# Altium PCB FMCOMMS3.PcbDoc (part 3 of 3)
Units mil, origin at the board's own origin, x right, y up, seen from the top; angles counter-clockwise.
Board outline 3368 x 2770 mil, 4 copper layers (Top Layer, Layer 1, Layer 2, Bottom Layer), stack 23.756 mil thick; 160 components, 137 nets, 746 pads, 735 vias.
Unrouted connection lines stored in the file: 16.
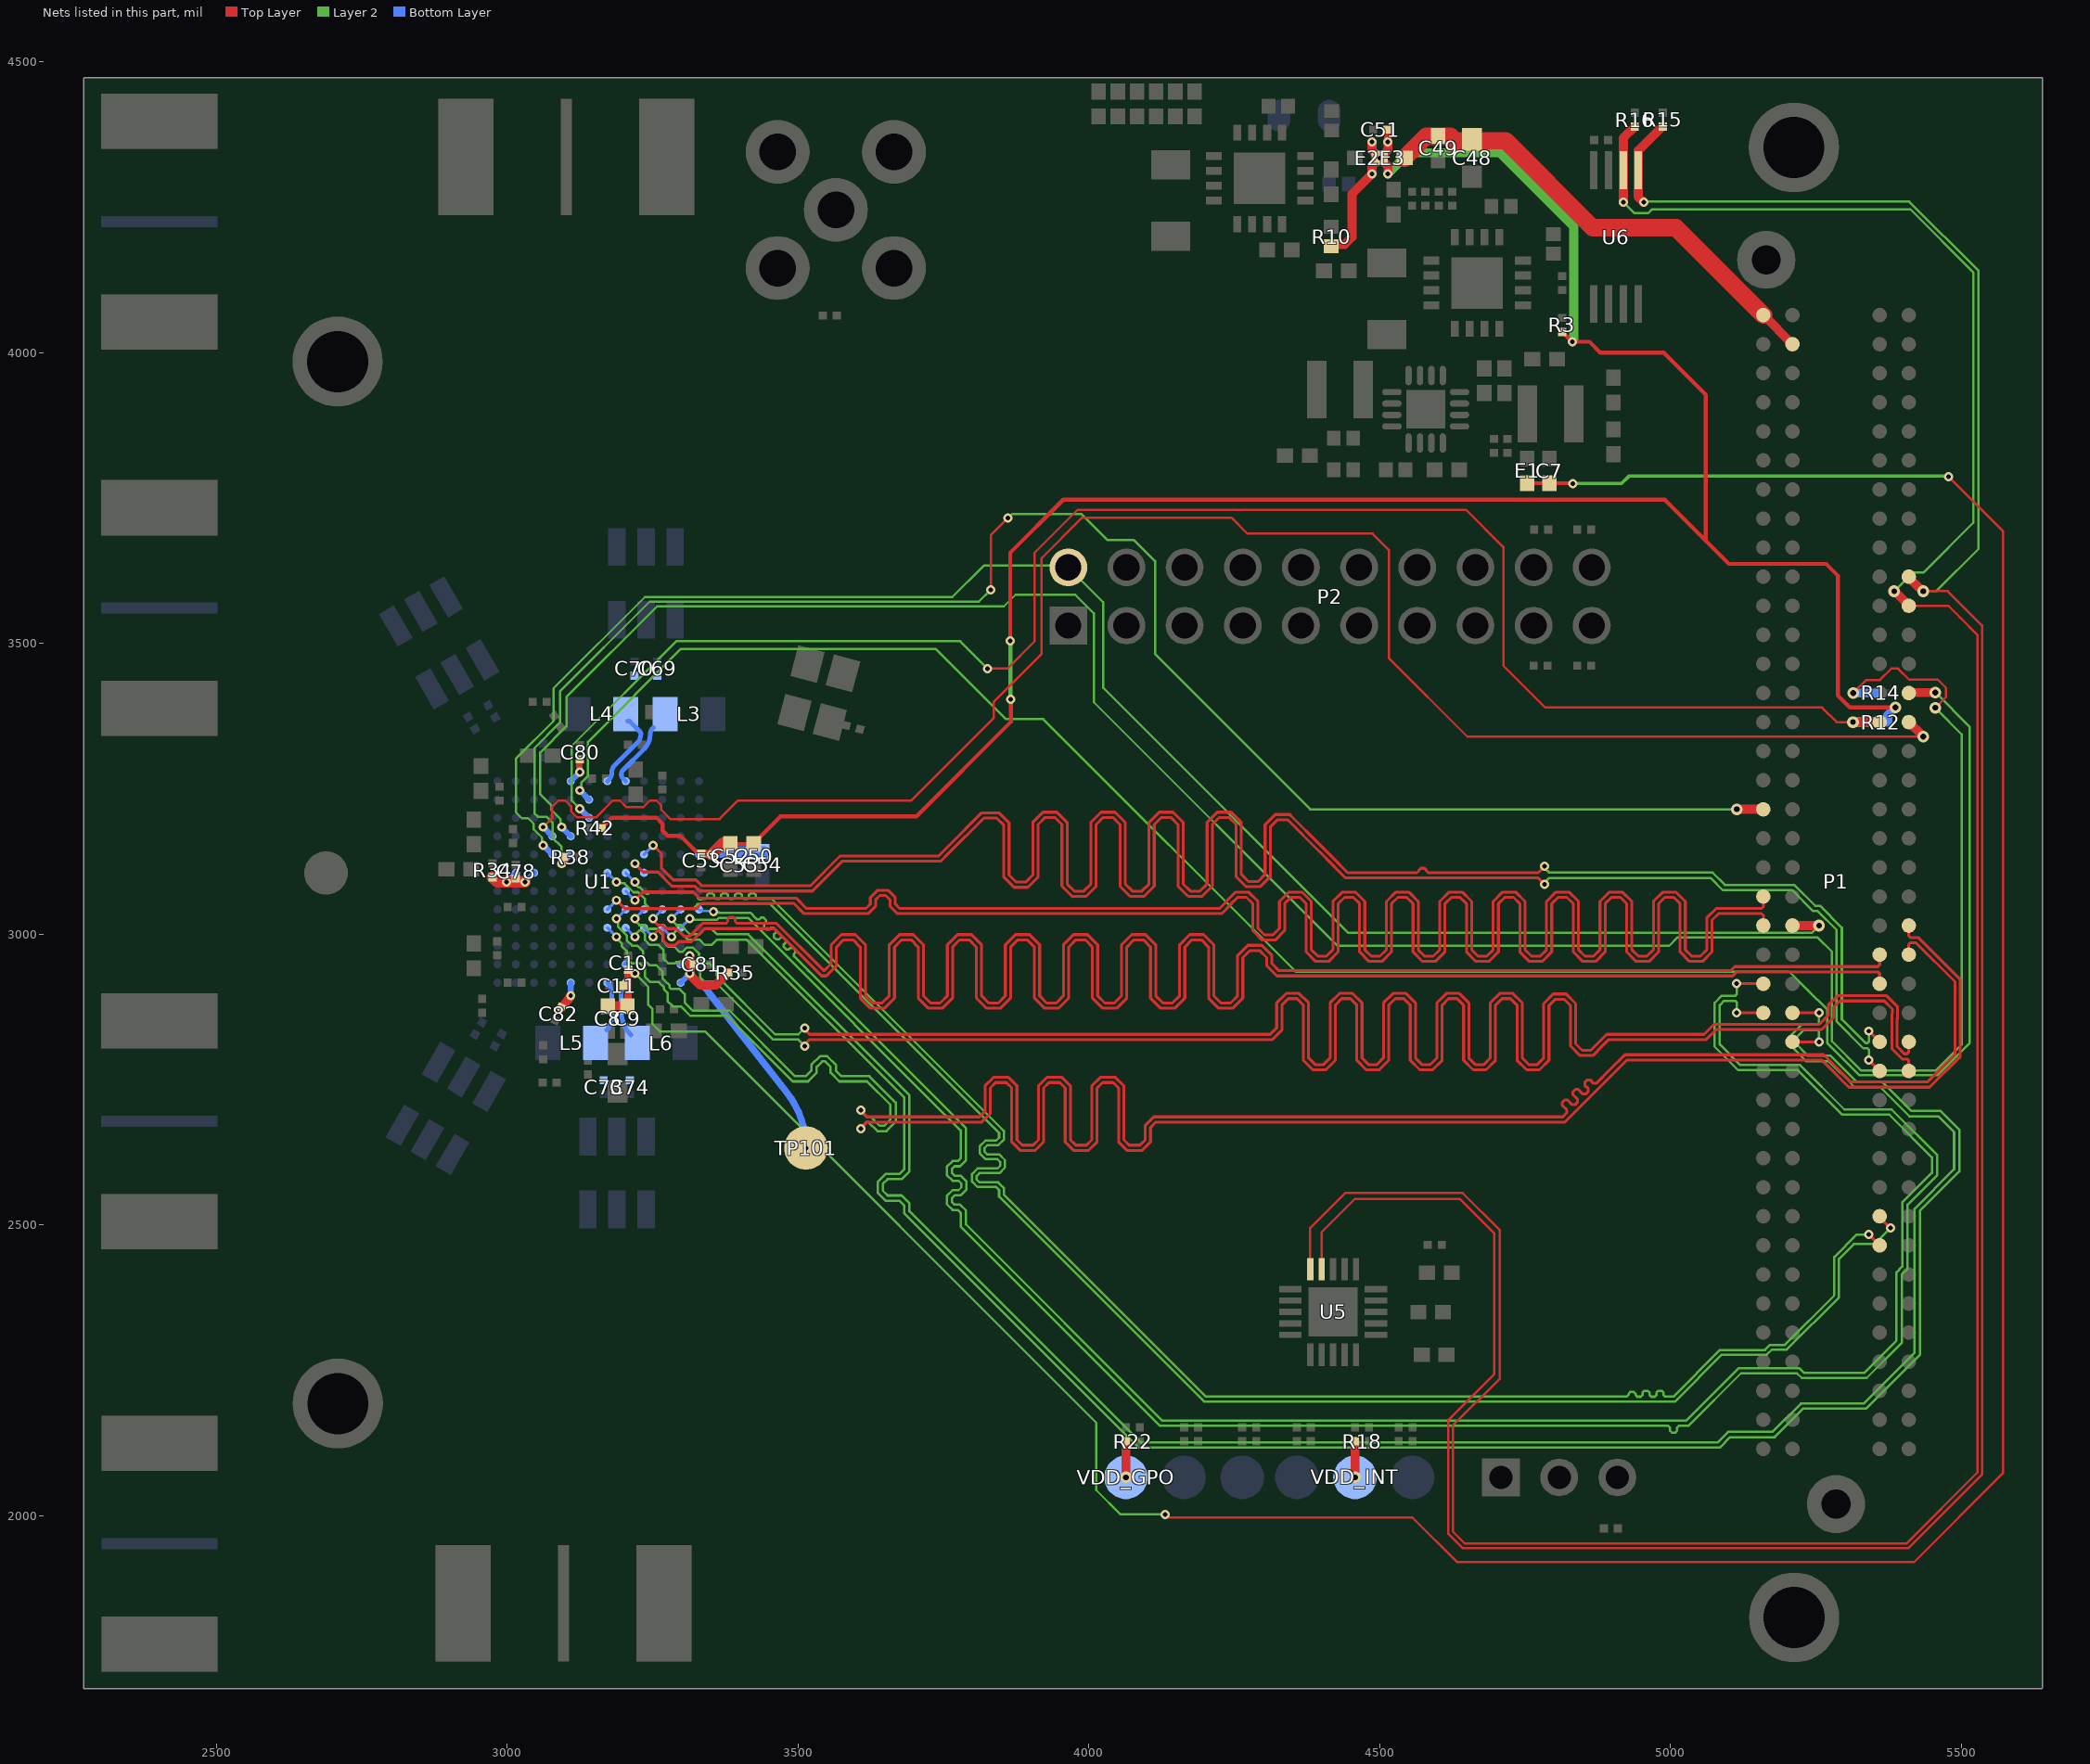
[diagram p5: the nets of this part, all layers, seen from the top]

## Via types
v1: diameter 20, hole 10, Top Layer to Bottom Layer, tented both sides, 410 vias
v2: diameter 15.75, hole 7.87, Top Layer to Bottom Layer, tented both sides, 157 vias
v3: diameter 16, hole 8, Top Layer to Bottom Layer, tented both sides, 154 vias
v4: diameter 28, hole 12, Top Layer to Bottom Layer, 14 vias

## Nets (pads, with @x,y where several pads share a name; then routed paths per layer and width w, separated by ;. In a path a pad name is that pad's centre, name@x,y a point inside that pad or via, vN(x,y) a via of type N, cw(c..) or ccw(c..) an arc to the next point about the centre after c; other vN are vias at no path point) (continued)
RX_FRAME_N: P1.D9 U1.G7 | length 2975.6
  Top Layer w4.96: P1.D9@5360,2513.36 v2(5378.54,2494.82)
  Layer 2 w4.02: v2(3188.23,3090) 3190.47,3087.76 3201.69,3087.76 3217.06,3072.38 3225.47,3072.38 3237.33,3060.53 3237.33,3052.76 3245.46,3044.63 3319.97,3044.63 3327.15,3051.8 3337.11,3051.8 3338.07,3052.76 3451.66,3052.76 3838.14,2666.27 3845.94,2658.47 3845.94,2650.16 3841.13,2645.35 3822.56,2645.35 3813.05,2635.85 3813.05,2622.79 3822.56,2613.29 3843.11,2613.29 3847.92,2608.48 3847.92,2602.08 3843.11,2597.27 3808.92,2597.27 3799.41,2587.77 3799.41,2574.71 3808.92,2565.21 3841.13,2565.21 3845.94,2560.4 3845.94,2556.05 3845.94,2549.06 4198.31,2196.69 5008.37,2196.69 5088.68,2277 5165.97,2277 5174.95,2285.98 5200.32,2285.98 5290.02,2375.68 5290.02,2441.65 5315.49,2467.11 5350.83,2467.11 v2(5378.54,2494.82)
  Bottom Layer w4.96: U1.G7@3172.48,3105.75 v2(3188.23,3090)
RX_FRAME_P: P1.D8 U1.G8 | length 2977.6
  Top Layer w4.96: v2(5341.46,2483.54) P1.D8@5360,2465
  Layer 2 w4.02: v2(3219.72,3090) 3219.72,3087.14 3226.46,3080.4 3228.79,3080.4 3239.47,3069.73 3242.8,3069.73 3245.46,3072.39 3319.97,3072.39 3328.1,3064.26 3328.1,3062.18 3330.46,3059.82 3333.79,3059.82 3334.75,3060.78 3340.81,3060.78 3343.81,3063.78 3343.81,3067.77 3346.82,3070.78 3352.83,3070.78 3355.83,3067.77 3355.83,3063.78 3358.84,3060.78 3364.85,3060.78 3367.85,3063.78 3367.85,3067.77 3370.86,3070.78 3376.87,3070.78 3379.87,3067.77 3379.87,3063.78 3382.88,3060.78 3388.89,3060.78 3391.89,3063.78 3391.89,3067.77 3394.9,3070.78 3400.91,3070.78 3403.91,3067.77 3403.91,3063.78 3406.92,3060.78 3412.93,3060.78 3415.93,3063.78 3415.93,3067.77 3418.94,3070.78 3424.95,3070.78 3427.95,3067.77 3427.95,3063.78 3430.96,3060.78 3444.99,3060.78 3454.98,3060.78 3849.48,2666.27 3853.96,2661.8 3853.96,2646.83 3844.46,2637.33 3825.88,2637.33 3821.07,2632.52 3821.07,2626.12 3825.88,2621.31 3846.44,2621.31 3855.94,2611.81 3855.94,2598.75 3846.44,2589.25 3812.24,2589.25 3807.43,2584.44 3807.43,2578.04 3812.24,2573.23 3844.46,2573.23 3853.96,2563.73 3853.96,2556.05 3853.96,2552.38 4201.34,2205 4922,2205 4925.2,2205 4928.21,2208.01 4928.21,2209.84 4931.21,2212.84 4937.22,2212.84 4940.23,2209.84 4940.23,2207.71 4943.23,2204.71 4949.24,2204.71 4952.25,2207.71 4952.25,2211.99 4955.25,2215 4961.26,2215 4964.27,2211.99 4964.27,2207.71 4967.27,2204.71 4973.28,2204.71 4976.29,2207.71 4976.29,2211.99 4979.29,2215 4985.3,2215 4988.31,2211.99 4988.31,2208.01 4991.31,2205 5005.34,2205 5085.36,2285.02 5162.65,2285.02 5171.63,2294 5197,2294 5282,2379 5282,2444.97 5320.57,2483.54 v2(5341.46,2483.54)
  Bottom Layer w4.96: U1.G8@3203.97,3105.75 v2(3219.72,3090)
RX_VCO_1P1V_SUPPLY: C78.1 R34.1 U1.G2 U1.G3 | length 103.7
  Top Layer w20: R34.1@2974.98,3098.26 2983.23,3090.01 v2(2999.25,3090.01) 3016.53,3090.01 v2(3030.74,3090.01)
  Bottom Layer w10: v2(2999.25,3090.01) U1.G2@3015,3105.75 ; v2(3030.74,3090.01) U1.G3@3046.49,3105.75
SCL: P1.C30 R16.1 U5.15 U6.6 | length 4978.4
  Top Layer w4: U5.15@4380.94,2424.05 4381,2424.1 4381,2495 4441,2555 4643,2555 4707,2491 4707,2236 4626,2155 4626,1973 4647,1952 5405.75,1952 5528,2074.25 5528,3515 5498,3545 5478,3565 P1.C30@5410,3565
  Top Layer w15.5: v3(4919.41,4259.26) U6.6@4919.41,4313.92 4919.41,4369.76 R16.1@4939.11,4389.46 ; v1@5391.46,3584.36 P1.C30@5410,3565.82
  Layer 2 w4: v3(4919.41,4259.26) 4938.67,4240 4962,4240 4969,4247 5412.63,4247 5521,4138.63 5521,3707.55 5436.07,3622.63 5417.63,3622.63 v1(5385,3590)
SDA: P1.C31 R15.1 U5.14 U6.5 | length 4930.5
  Top Layer w4: U5.14@4400.62,2424.05 4400.62,2487.62 4458,2545 4638,2545 4697,2486 4697,2243 4618,2164 4618,1981 4618,1969.69 4643.69,1944 4655,1944 5409.06,1944 5536,2070.94 5536,3531 5477,3590 v1(5435,3590)
  Top Layer w15.5: v3(4954.11,4258.96) 4945,4268.07 U6.5@4945,4313.92 4945,4347.85 R15.1@4986.61,4389.46 ; P1.C31@5410,3614.18 v1@5428.54,3595.64
  Layer 2 w4: v3(4954.11,4258.96) 4955.15,4260 5410.94,4260 5530,4140.94 5530,3663 5457,3590 v1(5435,3590)
SPI_CLK: R14.2 U1.J5 | length 4163
  Top Layer w4: v1@5314.45,3415 5336.98,3437.53 5360.53,3437.53 5380,3457 5391.84,3457 5410.84,3438 5459.96,3438 5474,3423.96 5474,3407.96 v1(5455.81,3389.76)
  Layer 2 w4: v2(3093.75,3184.49) 3091.76,3186.48 3091.76,3198.36 3076.11,3214.01 3076.11,3221.73 3057,3240.84 3057,3312.63 3102,3357.63 3102,3408 3258,3564 3854.31,3564 3874.31,3584 3977,3584 4009,3552 4009,3399 4428,2980 4998,2980 5013,2995 5252.97,2995 5278,2969.97 5278,2816 5328,2766 5456.69,2766 5501,2810.31 5501,3344 v1@5458.25,3386.75
  Bottom Layer w10: v2(3093.75,3184.49) U1.J5@3109.49,3168.74
  Bottom Layer w15.5: v1(5314.45,3415) R14.2@5350,3415
SPI_DI: P1.C26 U1.J4 | length 3108.2
  Top Layer w4: v2(3062.25,3184.49) 3077.24,3199.48 3077.24,3219.1 3088,3229.86 3100.14,3229.86 3110,3220 3110,3211.61 3120.61,3201 3153,3201 3181.86,3229.86 3193.97,3229.86 3204.83,3219 3234.61,3219 3245.47,3229.86 3256.97,3229.86 3265.09,3221.74 3265.09,3214 3280.73,3198.36 3365.36,3198.36 3397,3230 3695,3230 3837,3372 3837,3400 3919,3482 3919,3647 3988,3716 4246,3716 4273,3689 4488,3689 4516,3661 4516,3475 4651,3340 v1(5435,3340)
  Top Layer w15.5: P1.C26@5410,3365 v1(5435,3340)
  Bottom Layer w10: v2(3062.25,3184.49) U1.J4@3077.99,3168.74
SPI_DO: P1.C27 U1.L6 | length 3587.1
  Top Layer w15.5: P1.C27@5410,3415.82 v1(5455.82,3415.82)
  Layer 2 w4: v2(3125.24,3247.48) 3127.49,3249.73 3127.49,3260.91 3139.11,3272.53 3139.11,3331.11 3299,3491 3737,3491 3858,3370 3922,3370 4356,2936 5204.44,2936 5237.07,2903.37 5270,2870.44 5270,2812.69 5324.69,2758 5460,2758 5515,2813 5515,3356.64 v1(5455.82,3415.82)
  Bottom Layer w10: v2(3125.24,3247.48) U1.L6@3140.98,3231.73
SPI_ENB: P1.D26 R12.1 U1.K6 | length 2987.6
  Top Layer w4: v2(3826,3457) 3860,3457 3907,3504 3907,3656 3981,3730 4649,3730 4713,3666 4713,3462 4785,3390 5261,3390 5286,3365 v1(5314.18,3365)
  Top Layer w15.5: v1(5314.18,3365) P1.D26@5360,3365
  Layer 2 w4: v2(3125.24,3215.99) 3111,3230.23 3111,3324 3291,3504 3779,3504 v2(3826,3457)
  Bottom Layer w10: v2(3125.24,3215.99) U1.K6@3140.98,3200.24
  Bottom Layer w15.5: v1(5314.18,3365) R12.1@5349.73,3365
SYNC_IN: P1.H23 R38.2 U1.H5 | length 2932.8
  Top Layer w4: v3(3831.68,3592.68) 3831.68,3686.68 v3(3861,3716)
  Top Layer w15.5: v2(3093.74,3121.5) 3097.23,3124.99 R38.2@3097.23,3132.51 ; v1(5114.18,3215) P1.H23@5160,3215
  Layer 2 w4: v2(3093.74,3121.5) 3093.74,3150.26 3078,3166 3078,3192 3067.89,3202.11 3052.89,3202.11 3047,3208 3047,3320 3091,3364 3091,3418 3245,3572 3811.01,3572 3831.41,3592.41 v3@3831.41,3593.41 ; v3(3861,3716) 3862.34,3716 3869.34,3723 3987.31,3723 4032.31,3678 4078,3678 4114,3642 4114,3482 4381,3215 v1(5114.18,3215)
  Bottom Layer w10: v2(3093.74,3121.5) U1.H5@3109.49,3137.24
TX1A_N: C69.1 L3.2 U1.M8 | length 115.4
  Bottom Layer w8: U1.M8@3203.97,3263.23 3199.21,3267.99 cw(c3206.32,3275.1) 3196.27,3275.1 cw(c3206.32,3275.1) 3199.21,3282.21 3235.6,3318.6 ccw(c3210.31,3343.9) 3246.08,3343.9 cw(c3261.01,3343.9) 3246.08,3344 cw(c3261.01,3343.9) 3250.44,3354.44 L3.2@3251.6,3355.6
TX1A_P: C70.1 L4.2 U1.M7 | length 135.8
  Bottom Layer w8: U1.M7@3172.48,3263.23 3174.89,3265.64 ccw(c3162.09,3278.43) 3180.19,3278.43 cw(c3198.28,3278.43) 3185.48,3291.23 3224.16,3329.9 ccw(c3210.06,3344) 3230,3344 ccw(c3222.76,3344) 3227.88,3349.12 3212.12,3364.88 ccw(c3207,3359.76) L4.2@3207,3367
TX2A_N: C73.1 L5.2 U1.A7 | length 85.2
  Bottom Layer w8: L5.2@3171.65,2835.83 ccw(c3151.48,2856) 3180,2856 3180,2898.62 ccw(c3154.33,2898.62) U1.A7@3172.48,2916.77
TX2A_P: C74.1 L6.2 U1.A8 | length 96.4
  Bottom Layer w8: U1.A8@3203.97,2916.77 ccw(c3222.57,2898.17) 3196.26,2898.17 3196.26,2867.15 3196.26,2867.09 ccw(c3253.12,2867.09) L6.2@3212.92,2826.89
TX_D0_N: P1.H17 U1.E12 | length 3678.8
  Top Layer w4.96: v2(5114.18,2915) P1.H17@5160,2915
  Layer 2 w4.02: v2(3355,3038.88) 3355.88,3038 3364,3038 3364.74,3037.26 3418.15,3037.26 3428.21,3027.21 3429.63,3025.79 3433.88,3025.79 3436.7,3028.61 3440.95,3028.61 3445.2,3024.36 3445.2,3020.11 3441.67,3016.58 3441.67,3012.33 3445.92,3008.08 3450.17,3008.08 3453.7,3011.61 3457.95,3011.61 3462.2,3007.36 3462.2,3003.11 3458.67,2999.58 3458.67,2995.33 3462.92,2991.08 3467.17,2991.08 3470.7,2994.61 3474.95,2994.61 3479.2,2990.36 3479.2,2986.11 3475.67,2982.58 3475.67,2978.33 3479.92,2974.08 3484.17,2974.08 3486.64,2976.56 3490.89,2976.56 3495.14,2972.31 3495.14,2968.06 3493.37,2966.29 3493.37,2962.04 3517.29,2938.13 3518.71,2936.71 3789,2666.41 3789,2653 3789,2611.17 3778.91,2601.08 3769.7,2601.08 3764.9,2596.27 3764.9,2589.86 3769.7,2585.06 3779.89,2585.06 3789.98,2574.97 3789.98,2561.09 3779.89,2551 3769.7,2551 3764.9,2546.19 3764.9,2539.78 3769.7,2534.98 3778.91,2534.98 3789,2524.89 3789,2516.5 3789,2501 4126.5,2163.5 5027.28,2163.5 5117.8,2254.02 5221.74,2254.02 5229.76,2246 5334,2246 5389,2301 5389,2418.76 5398.98,2428.74 5398.98,2538.88 5449.98,2589.88 5449.98,2616.52 5376.75,2689.75 5295.67,2689.75 5219.21,2766.21 5116.79,2766.21 5076.06,2806.94 5076.06,2881.82 5088.75,2894.51 5111.83,2894.51 5114.18,2896.86 v2(5114.18,2915)
  Bottom Layer w4.02: U1.E12@3329.96,3042.76 3331.87,3040.85 3336.45,3040.85 3337.3,3040 3353.88,3040 v2(3355,3038.88)
TX_D0_P: P1.H16 U1.D11 | length 3677.6
  Top Layer w4.96: v2(5114.18,2865) P1.H16@5160,2865
  Layer 2 w4.02: v2(3314.21,3027.01) 3316.23,3024.99 3360.75,3024.99 3364,3028.24 3414.42,3028.24 3779.98,2662.68 3779.98,2653 3779.98,2614.9 3775.17,2610.1 3765.97,2610.1 3755.88,2600.01 3755.88,2586.13 3765.97,2576.04 3776.15,2576.04 3780.96,2571.23 3780.96,2564.82 3776.15,2560.02 3765.97,2560.02 3755.88,2549.93 3755.88,2536.05 3765.97,2525.96 3775.17,2525.96 3779.98,2521.15 3779.98,2516.5 3779.98,2497.26 4122.76,2154.48 4903.37,2154.48 4996.7,2154.48 4999.71,2151.47 4999.71,2146.09 5002.71,2143.08 5008.72,2143.08 5011.73,2146.09 5011.73,2151.47 5014.73,2154.48 5016.74,2154.48 5031.02,2154.48 5121.54,2245 5218,2245 5226.02,2236.98 5337.74,2236.98 5398.02,2297.26 5398.02,2415.02 5408,2425 5408,2535.14 5459,2586.14 5459,2620.25 5380.49,2698.77 5299.41,2698.77 5222.95,2775.23 5120.52,2775.23 5085.08,2810.68 5085.08,2878.08 5092.49,2885.49 5111.83,2885.49 5114.18,2883.14 v2(5114.18,2865)
  Bottom Layer w4.96: U1.D11@3298.46,3011.26 v2(3314.21,3027.01)
TX_D1_N: P1.G16 U1.E11 | length 3677.6
  Top Layer w4.96: P1.G16@5210,2865 v2(5255.82,2865)
  Layer 2 w4.02: v2(3282.71,3027.01) 3282.71,3024.62 3291.56,3015.77 3298.62,3015.77 3314.37,3000.02 3330.58,3000.02 3339.96,3009.4 3351.46,3009.4 3360.84,3000.02 3414.74,3000.02 3692,2722.76 3692,2694.87 3692,2592.52 3678.31,2578.83 3654.49,2578.83 3646.09,2570.42 3646.09,2559.21 3654.49,2550.81 3678.31,2550.81 3692,2537.12 3692,2528.73 3692,2523.71 4089.69,2126.02 5081.29,2126.02 5099.39,2144.12 5175.71,2144.12 5224.61,2193.02 5332.68,2193.02 5420,2280.34 5420,2528.02 5488,2596.02 5488,2660 5461,2687 5411,2687 5361,2737 5316.99,2737 5271.99,2782 5233.26,2782 5206.98,2808.28 5206.98,2825.7 5225.79,2844.51 5253.47,2844.51 5255.82,2846.86 v2(5255.82,2865)
  Bottom Layer w4.96: v2(3282.71,3027.01) U1.E11@3298.46,3042.76
TX_D1_P: P1.G15 U1.D10 | length 3677.6
  Top Layer w4.96: P1.G15@5210,2815 v2(5255.82,2815)
  Layer 2 w4.02: v2(3282.72,2995.51) 3282.72,2997.91 3291.56,3006.75 3294.89,3006.75 3310.64,2991 3330.6,2991 3339.96,2981.64 3351.46,2981.64 3360.82,2991 3411,2991 3682.98,2719.02 3682.98,2694.87 3682.98,2596.25 3674.57,2587.85 3650.76,2587.85 3637.07,2574.16 3637.07,2555.48 3650.76,2541.79 3674.57,2541.79 3682.98,2533.38 3682.98,2528.73 3682.98,2519.97 4085.95,2117 5085.03,2117 5103.13,2135.1 5179.44,2135.1 5228.34,2184 5336.41,2184 5429.02,2276.61 5429.02,2524.28 5497.02,2592.28 5497.02,2663.74 5464.74,2696.02 5414.74,2696.02 5364.74,2746.02 5320.73,2746.02 5275.73,2791.02 5237,2791.02 5216,2812.02 5216,2821.96 5229.53,2835.49 5253.47,2835.49 5255.82,2833.14 v2(5255.82,2815)
  Bottom Layer w4.96: U1.D10@3266.97,3011.26 v2(3282.72,2995.51)
TX_D2_N: P1.D18 U1.E10 | length 3681.5
  Top Layer w4.96: v2(3251.22,3027.01) 3251.22,3024.09 3256.52,3018.79 3256.52,3018.65 3259.42,3015.74 3267.24,3015.74 3273.12,3009.86 3290.81,3009.86 3300.95,2999.72 3304.34,2996.34 3313.55,2996.34 3336.05,3018.83 3343.84,3018.83 3376.04,3018.83 3379.28,3022.07 3379.28,3026.36 3382.52,3029.6 3389,3029.6 3392.24,3026.36 3392.24,3022.07 3395.48,3018.83 3410.92,3018.83 3463.17,3018.83 3539.87,2942.13 3544.66,2937.34 3544.97,2937.34 3557.26,2949.62 3557.26,2981.84 3574.8,2999.38 3598.6,2999.38 3616.14,2981.84 3616.14,2894.1 3628.43,2881.81 3644.81,2881.81 3657.1,2894.1 3657.1,2981.84 3674.64,2999.38 3698.44,2999.38 3715.98,2981.84 3715.98,2894.1 3728.27,2881.81 3744.65,2881.81 3756.94,2894.1 3756.94,2981.84 3774.48,2999.38 3798.28,2999.38 3815.82,2981.84 3815.82,2894.1 3828.11,2881.81 3844.49,2881.81 3856.78,2894.1 3856.78,2981.84 3874.32,2999.38 3898.12,2999.38 3915.66,2981.84 3915.66,2894.1 3927.95,2881.81 3944.33,2881.81 3956.62,2894.1 3956.62,2981.84 3974.16,2999.38 3997.96,2999.38 4015.5,2981.84 4015.5,2894.1 4027.79,2881.81 4044.17,2881.81 4056.46,2894.1 4056.46,2981.84 4074,2999.38 4097.8,2999.38 4115.34,2981.84 4115.34,2894.1 4127.63,2881.81 4144.01,2881.81 4156.3,2894.1 4156.3,2981.84 4173.84,2999.38 4197.64,2999.38 4215.18,2981.84 4215.18,2894.1 4227.47,2881.81 4243.85,2881.81 4256.14,2894.1 4256.14,2963.56 4273.68,2981.1 4297.48,2981.1 4315.02,2963.56 4315.02,2949.62 4327.31,2937.34 4920.24,2937.34 5103.54,2937.34 5110.69,2944.48 5357.09,2944.48 5360,2947.39 P1.D18@5360,2965
  Layer 2 w4.02: v2(3251.22,3027.01) v2@3253.46,3024.77
  Bottom Layer w4.96: v2(3251.22,3027.01) U1.E10@3266.97,3042.76
TX_D2_P: P1.D17 U1.D9 | length 3677.6
  Top Layer w4.96: v2(3251.22,2995.51) 3251.22,2998.43 3256.52,3003.73 3256.52,3003.87 3259.42,3006.78 3263.53,3006.78 3268.37,3001.95 3268.37,2989.56 3276.77,2981.16 3289.16,2981.16 3295.38,2987.38 3317.27,2987.38 3339.76,3009.87 3459.45,3009.87 3539.87,2929.46 3540.95,2928.38 3548.68,2928.38 3566.22,2945.91 3566.22,2978.13 3578.51,2990.42 3594.89,2990.42 3607.18,2978.13 3607.18,2890.38 3624.72,2872.85 3648.52,2872.85 3666.06,2890.38 3666.06,2978.13 3678.35,2990.42 3694.73,2990.42 3707.02,2978.13 3707.02,2890.38 3724.56,2872.85 3748.36,2872.85 3765.9,2890.38 3765.9,2978.13 3778.19,2990.42 3794.57,2990.42 3806.86,2978.13 3806.86,2890.38 3824.4,2872.85 3848.2,2872.85 3865.74,2890.38 3865.74,2978.13 3878.03,2990.42 3894.41,2990.42 3906.7,2978.13 3906.7,2890.38 3924.24,2872.85 3948.04,2872.85 3965.58,2890.38 3965.58,2978.13 3977.87,2990.42 3994.25,2990.42 4006.54,2978.13 4006.54,2890.38 4024.08,2872.85 4047.88,2872.85 4065.42,2890.38 4065.42,2978.13 4077.71,2990.42 4094.09,2990.42 4106.38,2978.13 4106.38,2890.38 4123.92,2872.85 4147.72,2872.85 4165.26,2890.38 4165.26,2978.13 4177.55,2990.42 4193.93,2990.42 4206.22,2978.13 4206.22,2890.38 4223.76,2872.85 4247.56,2872.85 4265.1,2890.38 4265.1,2959.85 4277.39,2972.14 4293.77,2972.14 4306.06,2959.85 4306.06,2945.91 4323.6,2928.38 4920.24,2928.38 5107.26,2928.38 5114.4,2935.52 5357.09,2935.52 5360,2932.61 P1.D17@5360,2915
  Layer 2 w4.02: v2(3251.22,2995.51) v2@3252.08,2995.51
  Bottom Layer w4.96: U1.D9@3235.47,3011.26 v2(3251.22,2995.51)
TX_D3_N: P1.C15 U1.E9 | length 3676.8
  Top Layer w4.96: v3(3512,2839) 3512,2836.01 3520.13,2827.88 4307.07,2827.88 4312.17,2827.88 4323.26,2838.97 4323.26,2881.92 4339.6,2898.26 4361.81,2898.26 4378.14,2881.92 4378.14,2787.03 4389.23,2775.94 4404.01,2775.94 4415.1,2787.03 4415.1,2881.92 4431.44,2898.26 4453.65,2898.26 4469.98,2881.92 4469.98,2787.03 4481.07,2775.94 4495.85,2775.94 4506.94,2787.03 4506.94,2881.92 4523.28,2898.26 4545.48,2898.26 4561.82,2881.92 4561.82,2787.03 4572.91,2775.94 4587.69,2775.94 4598.78,2787.03 4598.78,2881.92 4615.12,2898.26 4637.32,2898.26 4653.66,2881.92 4653.66,2787.03 4664.75,2775.94 4679.53,2775.94 4690.62,2787.03 4690.62,2881.92 4706.96,2898.26 4729.16,2898.26 4745.5,2881.92 4745.5,2787.03 4756.59,2775.94 4771.37,2775.94 4782.46,2787.03 4782.46,2881.09 4798.8,2897.43 4821.01,2897.43 4837.34,2881.09 4837.34,2811.54 4848.43,2800.45 4863.21,2800.45 4874.3,2811.54 4890.64,2827.88 4981.03,2827.88 5058.22,2827.88 5075.34,2845 5256.12,2845 5271.71,2860.6 5271.71,2878.05 5288,2894.34 5371.71,2894.34 5390.96,2875.09 5390.96,2855.94 5390.06,2855.04 5390.06,2806.74 5402.32,2794.48 5407.09,2794.48 5410,2797.39 P1.C15@5410,2815
  Layer 2 w4.02: v2(3219.72,3027.01) 3219.72,3023.89 3227.84,3015.77 3234.91,3015.77 3241.71,3008.97 3245.04,3008.97 3245.47,3009.39 3256.97,3009.39 3267.38,2998.99 3267.38,2988.38 3276.69,2979.07 3287.3,2979.07 3296.6,2969.76 3301.43,2969.76 3308.46,2976.79 3319.96,2976.79 3329.96,2966.79 3329.96,2960.14 3339.96,2950.14 3347.74,2950.14 3359.59,2938.28 3359.59,2929.33 3461.01,2827.91 3500.91,2827.91 v3(3512,2839)
  Bottom Layer w4.96: v2(3219.72,3027.01) U1.E9@3235.47,3042.76
TX_D3_P: P1.C14 U1.D8 | length 3677.6
  Top Layer w4.96: v3(3512,2807.8) 3512,2810.79 3520.13,2818.92 4307.07,2818.92 4315.89,2818.92 4332.22,2835.26 4332.22,2878.21 4343.31,2889.3 4358.09,2889.3 4369.18,2878.21 4369.18,2783.32 4385.52,2766.98 4407.73,2766.98 4424.06,2783.32 4424.06,2878.21 4435.15,2889.3 4449.93,2889.3 4461.02,2878.21 4461.02,2783.32 4477.36,2766.98 4499.56,2766.98 4515.9,2783.32 4515.9,2878.21 4526.99,2889.3 4541.77,2889.3 4552.86,2878.21 4552.86,2783.32 4569.2,2766.98 4591.4,2766.98 4607.74,2783.32 4607.74,2878.21 4618.83,2889.3 4633.61,2889.3 4644.7,2878.21 4644.7,2783.32 4661.04,2766.98 4683.24,2766.98 4699.58,2783.32 4699.58,2878.21 4710.67,2889.3 4725.45,2889.3 4736.54,2878.21 4736.54,2783.32 4752.88,2766.98 4775.09,2766.98 4791.42,2783.32 4791.42,2877.38 4802.51,2888.47 4817.29,2888.47 4828.38,2877.38 4828.38,2807.83 4844.72,2791.49 4866.93,2791.49 4883.26,2807.83 4894.35,2818.92 4981.03,2818.92 5061.93,2818.92 5079.05,2836.04 5259.83,2836.04 5280.67,2856.88 5280.67,2874.34 5291.71,2885.38 5368,2885.38 5382,2871.38 5382,2864 5381.1,2863.1 5381.1,2803.03 5398.61,2785.52 5407.09,2785.52 5410,2782.61 P1.C14@5410,2765
  Layer 2 w4.02: v2@3220.46,2995.51 v2(3219.72,2995.51) 3219.72,2998.63 3227.84,3006.75 3231.17,3006.75 3237,3000.92 3237,2990.1 3245.47,2981.63 3260.63,2981.63 3268.8,2973.45 3268.8,2958.3 3276.97,2950.13 3288.47,2950.13 3290.67,2952.33 3302.35,2952.33 3305.66,2949.02 3317.35,2949.02 3331.83,2934.54 3331.83,2926.78 3339.96,2918.65 3357.52,2918.65 3457.27,2818.89 3500.91,2818.89 v3(3512,2807.8)
  Bottom Layer w4.96: U1.D8@3203.97,3011.26 v2(3219.72,2995.51)
TX_D4_N: P1.C19 U1.E8 | length 3675.2
  Top Layer w4.96: v3(3608,2666) 3619.12,2677.12 3807.47,2677.12 3816.28,2677.12 3830.77,2691.61 3830.77,2735.83 3840.01,2745.07 3858.49,2745.07 3867.73,2735.83 3867.73,2642.86 3882.22,2628.38 3908.12,2628.38 3922.61,2642.86 3922.61,2735.83 3931.85,2745.07 3950.33,2745.07 3959.57,2735.83 3959.57,2642.86 3974.06,2628.38 3999.96,2628.38 4014.45,2642.86 4014.45,2735.83 4023.69,2745.07 4042.17,2745.07 4051.41,2735.83 4051.41,2642.86 4065.9,2628.38 4091.8,2628.38 4106.29,2642.86 4106.29,2667.88 4115.53,2677.12 4408.6,2677.12 4818.79,2677.12 4925.65,2783.98 5260.15,2783.98 5307.09,2737.04 5445.71,2737.04 5498.52,2789.85 5498.52,2922.15 5426.19,2994.48 5412.91,2994.48 5410,2997.39 P1.C19@5410,3015
  Layer 2 w4.02: v2(3188.22,3027.01) 3190.46,3024.77 3190.46,3013.55 3205.84,2998.18 3205.84,2989.76 3214.94,2980.65 3223.97,2980.65 3233.61,2971.01 3233.61,2958.14 3245.35,2946.4 3256.97,2946.4 3267.38,2936 3267.38,2924.38 3270.57,2921.19 3279.02,2912.74 3279.02,2908.74 3281.9,2905.86 3285.23,2905.86 ; 3285.25,2905.88 3296.75,2905.88 3305.38,2897.26 3305.38,2882.38 3318.99,2868.77 3382.23,2868.77 3494.97,2756.03 3509,2756.03 3513.65,2756.03 3523.26,2765.64 3523.26,2775.46 3538.15,2790.35 3550.43,2790.35 3565.32,2775.46 3565.32,2765.64 3574.93,2756.03 3607.36,2756.03 3622.73,2756.03 3668.31,2710.44 3668.31,2677.56 3652.24,2661.48 3636.83,2661.48 3621.22,2677.09 3617.89,2677.09 3608,2667.2 v3(3608,2666)
  Bottom Layer w4.96: v2(3188.22,3027.01) U1.E8@3203.97,3042.76
TX_D4_P: P1.C18 U1.D7 | length 3679
  Top Layer w4.96: v3(3608,2697.2) 3619.12,2686.08 3807.47,2686.08 3812.57,2686.08 3821.81,2695.32 3821.81,2739.54 3836.3,2754.03 3862.2,2754.03 3876.69,2739.54 3876.69,2646.58 3885.93,2637.34 3904.41,2637.34 3913.65,2646.58 3913.65,2739.54 3928.14,2754.03 3954.04,2754.03 3968.53,2739.54 3968.53,2646.58 3977.77,2637.34 3996.25,2637.34 4005.49,2646.58 4005.49,2739.54 4019.98,2754.03 4045.88,2754.03 4060.37,2739.54 4060.37,2646.58 4069.61,2637.34 4088.09,2637.34 4097.33,2646.58 4097.33,2671.59 4111.82,2686.08 4408.6,2686.08 4815.08,2686.08 4820.5,2691.5 4822.25,2693.25 4822.25,2697.84 4814.11,2705.98 4814.11,2710.56 4818.69,2715.15 4823.27,2715.15 4831.42,2707 4836,2707 4840.58,2711.58 4840.58,2716.16 4832.44,2724.31 4832.44,2728.89 4837.02,2733.47 4841.6,2733.47 4849.75,2725.33 4854.33,2725.33 4858.91,2729.91 4858.91,2734.49 4852.97,2740.43 4852.97,2745.02 4857.55,2749.6 4862.13,2749.6 4868.07,2743.66 4872.66,2743.66 4896,2767 4921.94,2792.94 5263.86,2792.94 5310.8,2746 5442,2746 5489.56,2793.56 5489.56,2918.44 5422.48,2985.52 5412.91,2985.52 5410,2982.61 P1.C18@5410,2965
  Layer 2 w4.02: v2(3188.23,2995.51) 3188.23,2993.77 3197,2985 3197,2980 3205.85,2971.15 3205.85,2958.26 3213.98,2950.13 3229.12,2950.13 ; 3229.12,2949.88 3237.37,2941.63 3237.37,2938.3 ; 3237.34,2938.27 3237.34,2926.77 3246.11,2918 3261,2918 3267.38,2911.62 3270,2909 3270,2905 3276,2899 3276,2885 3285,2876 3299,2876 3315.25,2859.75 3378.5,2859.75 3491.23,2747.01 3509,2747.01 3517.39,2747.01 3532.28,2761.9 3532.28,2771.72 3541.89,2781.33 3546.69,2781.33 3556.3,2771.72 3556.3,2761.9 3571.19,2747.01 3607.36,2747.01 3618.99,2747.01 3659.29,2706.71 3659.29,2681.29 3648.5,2670.5 3640.57,2670.5 3624.96,2686.11 3617.89,2686.11 3608,2696 v3(3608,2697.2)
  Bottom Layer w4.96: U1.D7@3172.48,3011.26 v2(3188.23,2995.51)
TX_D5_N: P1.H20 U1.F8 | length 3646.8
  Top Layer w4.96: v2(3219.72,3058.5) 3234.08,3072.86 3320.17,3072.86 3330.84,3062.19 3496.81,3062.19 3514.52,3044.48 3612,3044.48 3617.1,3044.48 3624.59,3051.97 3624.59,3063 3637.33,3075.74 3654.74,3075.74 3667.47,3063 3667.47,3051.97 3674.96,3044.48 3800,3044.48 4216.02,3044.48 4225.16,3044.48 4236.25,3055.57 4236.25,3056.36 4252.58,3072.7 4274.79,3072.7 4291.13,3056.36 4291.13,3010.1 4302.22,2999.02 4317,2999.02 4328.09,3010.1 4328.09,3056.36 4344.42,3072.7 4366.63,3072.7 4382.97,3056.36 4382.97,2973.36 4394.06,2962.27 4408.84,2962.27 4419.93,2973.36 4419.93,3056.36 4436.26,3072.7 4458.47,3072.7 4474.81,3056.36 4474.81,2973.36 4485.9,2962.27 4500.68,2962.27 4511.77,2973.36 4511.77,3056.36 4528.1,3072.7 4550.31,3072.7 4566.65,3056.36 4566.65,2973.36 4577.74,2962.27 4592.52,2962.27 4603.61,2973.36 4603.61,3056.36 4619.94,3072.7 4642.15,3072.7 4658.49,3056.36 4658.49,2973.36 4669.58,2962.27 4684.36,2962.27 4695.45,2973.36 4695.45,3056.36 4711.78,3072.7 4733.99,3072.7 4750.33,3056.36 4750.33,2973.36 4761.42,2962.27 4776.2,2962.27 4787.29,2973.36 4787.29,3056.36 4803.62,3072.7 4825.83,3072.7 4842.17,3056.36 4842.17,2973.36 4853.26,2962.27 4868.04,2962.27 4879.13,2973.36 4879.13,3056.36 4895.46,3072.7 4917.67,3072.7 4934.01,3056.36 4934.01,2973.36 4945.1,2962.27 4959.88,2962.27 4970.97,2973.36 4970.97,3056.36 4987.3,3072.7 5009.51,3072.7 5025.85,3056.36 5025.85,2973.36 5036.94,2962.27 5051.72,2962.27 5062.81,2973.36 5062.81,3028.14 5079.14,3044.48 5087.96,3044.48 5157.09,3044.48 5160,3047.39 P1.H20@5160,3065
  Bottom Layer w4.96: U1.F8@3203.97,3074.25 v2(3219.72,3058.5)
TX_D5_P: P1.H19 U1.E7 | length 3677.8
  Top Layer w4.96: v2(3188.23,3058.51) 3202.74,3044 3325.45,3044 3334.68,3053.23 3493.1,3053.23 3510.81,3035.52 3612,3035.52 3620.82,3035.52 3633.55,3048.26 3633.55,3059.29 3641.04,3066.78 3651.02,3066.78 3658.51,3059.29 3658.51,3048.26 3671.25,3035.52 3800,3035.52 4216.02,3035.52 4228.87,3035.52 4245.21,3051.86 4245.21,3052.65 4256.3,3063.74 4271.08,3063.74 4282.17,3052.65 4282.17,3006.39 4298.5,2990.06 4320.71,2990.06 4337.05,3006.39 4337.05,3052.65 4348.14,3063.74 4362.92,3063.74 4374.01,3052.65 4374.01,2969.65 4390.34,2953.31 4412.55,2953.31 4428.89,2969.65 4428.89,3052.65 4439.98,3063.74 4454.76,3063.74 4465.85,3052.65 4465.85,2969.65 4482.18,2953.31 4504.39,2953.31 4520.73,2969.65 4520.73,3052.65 4531.82,3063.74 4546.6,3063.74 4557.69,3052.65 4557.69,2969.65 4574.02,2953.31 4596.23,2953.31 4612.57,2969.65 4612.57,3052.65 4623.66,3063.74 4638.44,3063.74 4649.53,3052.65 4649.53,2969.65 4665.86,2953.31 4688.07,2953.31 4704.41,2969.65 4704.41,3052.65 4715.5,3063.74 4730.28,3063.74 4741.37,3052.65 4741.37,2969.65 4757.7,2953.31 4779.91,2953.31 4796.25,2969.65 4796.25,3052.65 4807.34,3063.74 4822.12,3063.74 4833.21,3052.65 4833.21,2969.65 4849.54,2953.31 4871.75,2953.31 4888.09,2969.65 4888.09,3052.65 4899.18,3063.74 4913.96,3063.74 4925.05,3052.65 4925.05,2969.65 4941.38,2953.31 4963.59,2953.31 4979.93,2969.65 4979.93,3052.65 4991.02,3063.74 5005.8,3063.74 5016.89,3052.65 5016.89,2969.65 5033.22,2953.31 5055.43,2953.31 5071.77,2969.65 5071.77,3024.43 5082.86,3035.52 5087.96,3035.52 5157.09,3035.52 5160,3032.61 P1.H19@5160,3015
  Bottom Layer w4.96: U1.E7@3172.48,3042.76 v2(3188.23,3058.51)
TX_EXT_LO: TP101.1 U1.A12 | length 344.8
  Bottom Layer w10: U1.A12@3329.96,2916.77 3345.71,2901.02
  Bottom Layer w11.55: 3345.71,2901.02 3390.74,2843.49 3480.78,2728.47 cw(c3358.37,2632.55) 3513.87,2633.84 ccw(c3525.42,2633.99) v2(3513.97,2632.5)
TX_FRAME_N: P1.D15 U1.H9 | length 3641.3
  Top Layer w4.96: v2(3251.22,3152.99) 3251.22,3152.87 3265.57,3138.51 3265.57,3113.48 3285.53,3093.52 3324.85,3093.52 3334.98,3083.4 3521.4,3083.4 3572.52,3134.52 3741.85,3134.52 3758.75,3151.42 3816.29,3208.96 3845.54,3208.96 3863.07,3191.42 3863.07,3101.93 3875.36,3089.64 3891.75,3089.64 3904.03,3101.93 3904.03,3192.46 3921.57,3210 3945.38,3210 3962.91,3192.46 3962.91,3086.53 3975.2,3074.24 3991.59,3074.24 4003.87,3086.53 4003.87,3192.46 4021.41,3210 4045.22,3210 4062.75,3192.46 4062.75,3086.53 4075.04,3074.24 4091.43,3074.24 4103.71,3086.53 4103.71,3192.46 4121.25,3210 4145.06,3210 4162.59,3192.46 4162.59,3086.53 4174.88,3074.24 4191.27,3074.24 4203.55,3086.53 4203.55,3192.46 4221.09,3210 4244.9,3210 4262.43,3192.46 4262.43,3102.91 4274.72,3090.62 4291.1,3090.62 4303.39,3102.91 4303.39,3188.41 4320.93,3205.94 4345.73,3205.94 4350.83,3200.84 4360.34,3191.34 4385.67,3166 4417.34,3134.34 4417.34,3134.06 4445.52,3105.88 4562,3105.88 4564.48,3105.88 4567.72,3109.12 4567.72,3110.15 4570.96,3113.39 4577.44,3113.39 4580.68,3110.15 4580.68,3109.12 4583.92,3105.88 4625,3105.88 4772.88,3105.88 v3(4784,3117) ; v2(5341.46,2833.54) P1.D15@5360,2815
  Layer 2 w4.02: v3(4784,3117) 4784,3113.76 4789.46,3108.29 ; 4789.46,3108.26 4791.82,3105.91 5072.95,3105.91 5093.86,3085 5213.18,3085 5249.19,3048.99 5257.23,3048.99 5295.03,3011.19 5295.03,2853.79 5335.77,2813.05 5339.11,2813.05 5341.46,2815.4 v2(5341.46,2833.54)
  Bottom Layer w4.96: U1.H9@3235.47,3137.24 v2(3251.22,3152.99)
TX_FRAME_P: P1.D14 U1.G9 | length 3641.3
  Top Layer w4.96: v2(3219.72,3121.5) 3234.07,3107.15 3259.23,3107.15 3283.76,3082.61 3323.09,3082.61 3331.26,3074.44 3525.11,3074.44 3576.23,3125.56 3745.56,3125.56 3758.75,3138.75 3820,3200 3841.83,3200 3854.11,3187.71 3854.11,3098.22 3871.65,3080.68 3895.46,3080.68 3912.99,3098.22 3912.99,3188.75 3925.28,3201.04 3941.67,3201.04 3953.95,3188.75 3953.95,3082.82 3971.49,3065.28 3995.3,3065.28 4012.83,3082.82 4012.83,3188.75 4025.12,3201.04 4041.51,3201.04 4053.79,3188.75 4053.79,3082.82 4071.33,3065.28 4095.14,3065.28 4112.67,3082.82 4112.67,3188.75 4124.96,3201.04 4141.35,3201.04 4153.63,3188.75 4153.63,3082.82 4171.17,3065.28 4194.98,3065.28 4212.51,3082.82 4212.51,3188.75 4224.8,3201.04 4241.19,3201.04 4253.47,3188.75 4253.47,3099.2 4271.01,3081.66 4294.82,3081.66 4312.35,3099.2 4312.35,3184.7 4324.64,3196.98 4342.02,3196.98 4350.83,3188.17 4357.03,3181.97 4381.96,3157.04 4408.38,3130.62 4408.38,3130.35 4441.8,3096.92 4772.88,3096.92 v3(4784,3085.8) ; v2(5341.46,2783.54) P1.D14@5360,2765
  Layer 2 w4.02: v3(4784,3085.8) 4784,3089.04 4789.46,3094.51 ; 4789.46,3094.54 4791.82,3096.89 5069.21,3096.89 5090.12,3075.98 5209.44,3075.98 5245.45,3039.97 5253.49,3039.97 5286.01,3007.45 5286.01,2850.06 5332.04,2804.03 5339.11,2804.03 5341.46,2801.68 v2(5341.46,2783.54)
  Bottom Layer w4.96: v2(3219.72,3121.5) U1.G9@3235.47,3105.75
TX_MON1: C80.2 U1.M5 | length 44.1
  Top Layer w11: C80.2@3125.1,3300.71 ccw(c3191.59,3290.27) v2(3125.24,3278.97)
  Bottom Layer w10: U1.M5@3109.49,3263.23 v2(3125.24,3278.97)
TX_MON2: C82.2 U1.A5 | length 49.1
  Top Layer w15.5: C82.2@3093.05,2873.38 ccw(c3016.52,2949.91) v2(3109.49,2894.5)
  Bottom Layer w10: v2(3109.49,2894.5) U1.A5@3109.49,2916.77
TX_VCO_1P1V_SUPPLY: C81.1 R35.1 U1.A11 U1.B11 | length 165.9
  Top Layer w15.5: v2@3314.21,2930.29 3331.85,2912.65 3359,2912.65 R35.1@3380.48,2934.13 ; v2@3314.21,2931.4 3314.21,2940.86 v2(3314.21,2962.9) ; C81.1@3314.66,2941.84 C81.1@3320.18,2947.36
  Bottom Layer w10: U1.A11@3298.46,2916.77 v2(3314.21,2932.52) ; U1.B11@3298.46,2948.27 3299.02,2948.27 3313.65,2962.9 v2(3314.21,2962.9)
TXNRX: P1.G19 P2.2 U1.H4 | length 3006.7
  Top Layer w15.5: P1.G19@5210,3015 v1(5255.82,3015)
  Layer 2 w4: v2(3062.25,3152.99) 3060,3155.24 3060,3166.42 3046,3180.42 3046,3190 3036.38,3199.62 3025.38,3199.62 3015,3210 3015,3302 3080,3367 3080,3423 3237,3580 3765.69,3580 3819.69,3634 3962,3634 4025,3571 4025,3424 4446,3003 5243.82,3003 v1(5255.82,3015)
  Bottom Layer w10: v2(3062.25,3152.99) U1.H4@3077.99,3137.24
VADJ: C48.1 C49.1 E3.2 P1.G39 P1.H40 | length 838.6
  Top Layer w15.5: C49.1@4596.73,4364.5 C49.1@4596.73,4372.5 ; P1.H40@5160,4065 P1.G39@5210,4015
  Top Layer w30: E3.2@4542.98,4335 4580.48,4372.5 4596.73,4372.5 4621.73,4372.5 4629.48,4364.75 4656.73,4364.75 4716.98,4364.75 4866.73,4215 5010,4215 P1.H40@5160,4065
VDD_INTERFACE: C50.1 C51.1 C52.1 C53.1 C54.1 C55.1 E2.1 E3.1 R3.1 R10.1 R12.2 R18.1 R42.1 U1.H12 VDD_INT.1 | length 4594.2
  Top Layer w7: R42.1@3163,3183 3180.62,3200.62 3256.84,3200.62 3267.34,3190.12 3267.34,3178.12 3276.34,3169.12 3298.08,3169.12 3324.7,3142.5 3330.5,3142.5 C53.1@3334,3139 ; C52.1@3384,3155.25 C50.1@3424,3155.25 3424,3156.5 3470,3202.5 3703.5,3202.5 3866,3365 v3(3866,3404) ; v3(3865,3505) 3865,3656 3956.5,3747.5 4990.5,3747.5 5061,3677 ; R3.1@4814,4036 v3@4831.5,4018.5 ; v3(4832,4019) 4861,4019 4880,4000 4989,4000 5061,3928 5061,3677 ; v1(5387,3390) 5309,3390 5288,3411 5288,3617 5268,3637 5101,3637 5061,3677
  Top Layer w12: 3341,3140 3344.48,3136.52 3351.01,3136.52 v2(3351.73,3137.24) v2@3352.23,3137.74 ; C51.1@4513,4384 4513.75,4383.25 4513.75,4363.25 v3(4514.5,4362.5)
  Top Layer w15.5: R10.1@4417,4183.27 4420.11,4186.38 4440.38,4186.38 4453,4199 4453,4273.5 v3(4487,4307.5) 4487,4321.25 v3(4500.75,4335) ; v1(4458,2066) R18.1@4458,2128 ; v3(4487,4362.5) 4487,4348.75 v3(4500.75,4335) ; v3(4514.5,4307.5) 4514.5,4321.25 v3(4500.75,4335) ; v3(4514.5,4362.5) 4514.5,4348.75 v3(4500.75,4335)
  Top Layer w20: v2@3352.23,3137.74 3370.74,3156.25
  Layer 2 w7: v3(3865,3505) 3865.5,3504.5 3865.5,3404.5 v3(3866,3404)
  Layer 2 w15.5: v3(4514.5,4307.5) 4551,4344 4707,4344 4834,4217 4834,4021 v3(4832,4019)
  Bottom Layer w10: U1.H12@3329.96,3137.24 v2(3351.73,3137.24) v2@3352.23,3137.74
  Bottom Layer w15.5: R12.2@5374,3365 5374,3377 v1(5387,3390)
  Bottom Layer w20: v2@3352.23,3137.74 3355.74,3141.25 C54.1@3439,3141.25 C54.1@3441.73,3141.25
VDDA_GPO: C7.1 C8.1 C9.1 C10.1 C11.1 E1.1 R22.1 U1.B8 VDD_GPO.1 | length 5601.5
  Top Layer w4: v3@4131,2003 4137,1997 4556.75,1997 4633.75,1920 5419,1920 5572,2073 5572,3693.54 v3(5478.27,3787.27)
  Top Layer w6: E1.1@4754,3775.75 C7.1@4792,3775.75 v3@4832.27,3775.75
  Top Layer w13: C11.1@3202.21,2911.26 3207.71,2911.26 ; C9.1@3207.71,2877.51 3207.71,2911.26 ; C10.1@3210.21,2934.26 3207.71,2931.76 3207.71,2911.26
  Top Layer w15.5: C8.1@3172.71,2877.51 C9.1@3207.71,2877.51 ; v1(4064,2066) R22.1@4064,2128
  Layer 2 w4: v2(3219.72,2932.52) 3243,2909.24 3243,2878.62 3249.56,2872.06 3249.56,2846.33 3262.9,2833 3340,2833 4013,2160 4013,2044 4054.73,2002.27 v3(4131.27,2002.27)
  Layer 2 w6: v3(4832.27,3775.27) 4916.27,3775.27 4929,3788 v3@5478,3788
  Bottom Layer w10: U1.B8@3203.97,2948.27 v2(3219.72,2932.52)
pads on no net: P1. P1.C2 P1.C3 P1.C6 P1.C7 P1.C22 P1.C23 P1.D4 P1.D5 P1.D20 P1.D21 P1.D29 P1.D33 P1.D34 P1.G2 P1.G3 P1.G30 P1.G31 P1.G33 P1.G34 P1.G36 P1.G37 P1.H1 P1.H5 P1.H32 P1.H34 P1.H35 P1.H37 P1.H38 U1.A3 U1.M3 U2.8 U4.8 U5.12
copper on no net: | length 1259.4
  Top Layer w20: v1(5114.18,2115) 5160,2115 ; v1(5114.18,3665) 5160,3665 ; v1(5114.18,3765) 5160,3765 ; v1(5114.18,3815) 5160,3815 ; v1(5114.18,3915) 5160,3915 ; v1(5114.18,3965) 5160,3965 ; 5210,2165 v1(5255.82,2165) ; 5210,2215 v1(5255.82,2215) ; 5210,3565 v1(5255.82,3565) ; 5210,3615 v1(5255.82,3615) ; 5210,3715 v1(5255.82,3715) ; 5210,3765 v1(5255.82,3765) ; 5210,3865 v1@5255.82,3865 ; 5210,3915 v1(5255.82,3915) ; v1(5314.18,2265) 5360,2265 ; v1(5314.18,2315) 5360,2315 ; v1(5314.18,3065) 5360,3065 ; v1(5314.18,3115) 5360,3115 ; v1(5314.18,3515) 5360,3515 ; v1(5314.18,3715) 5360,3715 ; v1(5314.18,3765) 5360,3765 ; 5410,2165 v1(5455.82,2165) ; 5410,2215 v1(5455.82,2215) ; 5410,2365 v1(5455.82,2365) ; 5410,2415 v1(5455.82,2415) ; 5410,3165 v1(5455.82,3165) ; 5410,3215 v1(5455.82,3215)
  Bottom Layer w10: v2(3046.49,2894.5) 3046.49,2916.77
  other v1: 5256.2,3865.2
  other v2: 3015,3438
  other v3: 4659.25,4270.25

## Polygon pours and split planes (outlines as drawn)
GND on Top Layer "GND_L01_P028" (solid, pour order 28): 2278,4467 2278,1708 5633,1708 5633,4467
1P3_SUPPLY_B on Top Layer "1P3_SUPPLY_B_L01_P023" (solid, pour order 23): 4001,4240 4177,4240 4180,4237 4180,4154 4177,4151 4000,4151 3995,4156 3995,4234
1P3_SUPPLY_A on Top Layer "1P3_SUPPLY_A_L01_P020" (solid, pour order 20): 4196.57,3899 4296,3899 4304,3907 4304,3993 4316,4005 4543,4005 4547,4009 4547,4080 4541,4086 4197,4086 4193,4082 4193,3902.85
NetC31_1 on Top Layer "NETC31_1_L01_P017" (solid, pour order 17): 4316,4361 4316,4404 4312,4408 4221,4408 4202,4427 4006,4427 3998,4419 3998,4282 4005,4275 4173,4275 4198,4300 4232,4300 4236,4304 4236,4352 4241,4357 4312,4357
1P8V on Top Layer "1P8V_L01_P010" (solid, pour order 10): 4435,3784 4435,3990 4425,4000 4323,4000 4310,3987 4310,3884 4312,3884 4361,3835 4361,3789 4366,3784
1P8V on Top Layer "1P8V_L01_P011" (solid, pour order 11): 4605,4116 4612,4109 4612,4065 4619,4058 4686,4058 4690,4054 4690,4013 4685,4008 4558,4008 4551,4015 4551,4112 4555,4116
NetC4_1 on Top Layer "NETC4_1_L01_P009" (solid, pour order 9): 4619,3945 4624,3950 4775,3950 4780,3945 4780,3844 4777,3841 4666,3841 4662,3845 4662,3880 4657,3885 4619,3885
3P3V on Top Layer "3P3V_L01_P007" (solid, pour order 7): 4814,3954 4807,3947 4807,3836 4813,3830 4872,3830 4892,3850 4970,3850 4975,3855 4975,3933 4971,3937 4888,3937 4871,3954
1P8V on Top Layer "1P8V_L01_P004" (solid, pour order 4): 4200,4296 4231,4296 4235,4292 4235,4245 4242,4238 4313,4238 4317,4234 4317,4195 4324,4188 4324,4165 4318,4159 4245,4159 4192,4212 4192,4288
NetL2_1 on Top Layer "NETL2_1_L01_P001" (solid, pour order 1): 4538,3887 4455,3887 4455,3987 4491,3987 4538,3940
NetC12_1 on Top Layer "NETC12_1_L01_P000" (solid, pour order 0): 4603,4126 4482,4126 4467,4141 4467,4247 4485,4265 4646,4265 4653,4258 4665,4258 4672,4265 4704,4265 4704,4226 4688,4210 4688,4185 4617,4185 4603,4171
1P3_SUPPLY_B on Layer 2 "1P3_SUPPLY_B_L03_P027" (solid, pour order 27): 2278,4467 5633,4467 5633,1708 2278,1708
1P3_SUPPLY_A on Layer 2 "1P3_SUPPLY_A_L03_P016" (solid, pour order 16): 2518,2849 2626,2849 2680,2903 2680,3472 3107,3899 4261,3899 4281,3919 4281,4046 4260,4067 2942,4067 2434,3559 2434,2933
1P3_SUPPLY_A on Layer 2 "1P3_SUPPLY_A_L03_P018" (solid, pour order 18): 2675.13,3035.87 2961,2750 3306,2750 3376,2680 3376,2441 3363,2428 2940,2428 2500.15,2867.85
3P3V on Layer 2 "3P3V_L03_P014" (solid, pour order 14): 4971.17,3954 5275,3954 5282,3961 5282,4111 5294,4123 5469,4123 5481,4111 5481,3845 5466,3830 4969.95,3830
1P8V on Layer 2 "1P8V_L03_P013" (solid, pour order 13): 4193,4242 4241,4242 4250,4233 4309,4233 4318,4224 4567,4224 4628,4163 4628,4064 4680,4064 4692,4052 4692,4014 4686,4008 4452,4008 4432,3988 4432,3792 4425,3785 4383,3785 4311,3857 4311,3992 4329,4010 4329,4103 4296,4136 4204,4136 4178,4162 4178,4237 4188,4237
3P3V on Layer 2 "c" (solid, pour order 6): 4807,3947 4814,3954 4876,3954 4975,3954 4975,3830 4876,3830 4813,3830 4807,3836
GND on Bottom Layer "ssd" (solid, pour order 24): 2278,4467 2278,1708 5633,1708 5633,4467
GND on Layer 1 "GND_L02_P025" (solid, pour order 25): 2278,4467 2278,1707 5633,1707 5633,4467

## Other copper
Top Layer:
  pour cut-out: 3345.71,2995.52 3346.19,2996 3461,2996 3482,2975 3482,2769 3633,2618 4098,2618 4137,2657 4819,2657 4932,2770 5114,2770 5114,2094.09 5455.82,2093.91 5455.82,4083 5114,4083 5114,3136 4434.82,3136 4350.82,3220 3815,3220 3740,3145 3345.98,3145
  pour cut-out: 2967.75,3215.99 3345.7,3215.99 3346,3215.69 3346,3170 3441,3170 3441,3097 3347,3097 3347,2933.82 3345.71,2932.53 2967.53,2932.53 2967,2932
  pour cut-out: 3597.89,3339.48 cw(c3597.59,3352.89) 3588.13,3362.41 3589.25,3363.52 cw(c3598.71,3354.08) 3598.73,3367.45 cw(c3598.89,3353.13) 3603.66,3366.63 ccw(c3594.86,3476.51) 3702.64,3453.4 ccw(c3405.16,3517.05) 3709.38,3517.03 ccw(c3405.39,3517.03) 3668.66,3669 cw(c4414.92,4099.99) 3553.85,4065.21 cw(c3567.23,4065.75) 3553.84,4065.75 ccw(c-4533.75,4065.75) 3551.84,4245.46 cw(c3565.25,4245.75) 3578.66,4246.05 cw(c-4533.62,4065.76) 3580.67,4066.02 ccw(c4414.81,4099.96) 3691.87,3682.46 cw(c3405.39,3517.03) 3736.21,3517.03 cw(c3405.4,3517.03) 3728.89,3447.84 cw(c3594.86,3476.51)
  pour cut-out: 3072.54,2421.24 cw(c3132.13,2480.86) 3047.84,2480.84 3047.84,2748.25 cw(c3061.25,2748.25) 3047.85,2748.8 ccw(c2161.56,2784.99) 3048.59,2785 cw(c3062,2785) 3075.41,2785 cw(c2161.25,2785) 3074.66,2747.98 3074.66,2480.84 ccw(c3132.09,2480.84) 3091.45,2440.27 3141.49,2390.24 cw(c3083.72,2332.47) 3165.41,2332.47 3165.41,2224.46 cw(c3100.79,2224.46) 3146.49,2178.76 ccw(c3233.63,2091.66) 3110.41,2091.68 3110.41,1783.25 cw(c3097,1783.25) 3083.59,1783.25 3083.59,2091.68 cw(c3233.57,2091.68) 3127.51,2197.74 ccw(c3100.79,2224.46) 3138.59,2224.46 3138.59,2332.47 ccw(c3083.72,2332.47) 3122.51,2371.26
  pour cut-out: 3116.34,3314.75 cw(c3467.08,3729.93) 3082.76,3345.62 cw(c3092.25,3355.11) 3101.74,3364.6 ccw(c3467.12,3729.98) 3133.66,3335.25 cw(c3125,3325) 3138.41,3325 cw(c3125,3325)
  pour cut-out: 3054.34,3486.25 ccw(c2482.6,3486.25) 3036.52,3627.88 cw(c3597.73,3771.45) 3018.59,3758.45 3018.59,3897.54 cw(c3083.21,3897.54) 3037.51,3943.24 3072.51,3978.24 ccw(c3033.72,4017.03) 3088.59,4017.03 3088.59,4393.75 cw(c3102,4393.75) 3115.41,4393.75 3115.41,4017.03 cw(c3033.72,4017.03) 3091.49,3959.27 3056.49,3924.27 ccw(c3083.26,3897.52) 3045.41,3897.54 3045.41,3758.9 ccw(c3597.51,3771.42) 3062.48,3634.63 cw(c2482.39,3486.23) 3081.16,3486.25 3081.16,3430 ccw(c3176.26,3429.97) 3081.93,3417.95 cw(c2961.14,3402.47) 3082.91,3402.63 ccw(c3108.78,3403.17) 3090.49,3384.88 cw(c3081,3375.39) 3094.41,3375.39 cw(c3081,3375.39) 3071.51,3365.91 cw(c3108.78,3403.17) 3056.09,3402.27 ccw(c2959.31,3402.34) 3055.31,3414.55 cw(c3176.3,3429.97) 3054.34,3430.01
Layer 2:
  pour cut-out: 2953,3399 2798,3244 2798,2969 2912,2855 3092,2855 3119,2882 3163,2882 3172,2873 3172,2828 3250,2750 3295,2750 3955,2090 3955,2011 4066,1900 5334,1900 5598,2164 5598,3524 5383,3739 4665,3739 4643,3717 4642,3718 4363,3718 4250,3831 3839,3831 3729,3721 3194,3721 2953,3480
Bottom Layer:
  pour cut-out: 2299,1994 2278,1994 2278,1910 2299,1910
  pour cut-out: 2298,2720 2278,2720 2278,2636 2298,2636
  pour cut-out: 2298,3604 2278,3604 2278,3520 2298,3520
  pour cut-out: 2298,4267 2278,4267 2278,4183 2298,4183
  pour cut-out: 2874.58,2732.23 2890,2723 2921.19,2705.03 2931,2714.83 2931,2723 2916,2723 2888,2751
  pour cut-out: 683 vertices and 0 holes, not listed, extent 2653.04,2602.57 3536.55,3598.08
  pour cut-out: 2493.73,1938.06 cw(c2493.73,1951.47) 2493.73,1964.89 ccw(c2493.73,2752.58) 3214.78,2435.5 ccw(c3061.15,2492.01) 3224.81,2488.69 3225.58,2527.26 cw(c3239,2526.99) 3252.41,2526.99 3251.64,2488.23 cw(c3061.09,2492.03) 3239.8,2425.81 3239.51,2425.08 cw(c2493.73,2752.58)
  pour cut-out: 2619.27,2613.64 2637.27,2595.63 ccw(c2790.15,2748.52) 2790.16,2532.32 ccw(c2790.16,2673.32) 2889.87,2573.61 2901.93,2585.67 ccw(c2892.44,2595.16) 2905.86,2595.16 ccw(c2892.44,2595.16) 2882.95,2604.65 2870.89,2592.59 cw(c2790.14,2673.38) 2790.16,2559.14 cw(c2790.15,2748.52) 2656.28,2614.57 2638.24,2632.61 ccw(c2497,2491.38) 2497,2691.12 ccw(c2497,2677.7) 2497,2664.29 cw(c2497,2491.37)
  pour cut-out: 2363.07,3548.2 cw(c2363.07,3561.61) 2363.07,3575.03 2734.97,3575.03 2762.99,3574.24 2775.8,3573.44 cw(c2774.95,3560.07) 2778.3,3573.04 cw(c2762.67,3512.44) 2821.03,3535.06 cw(c2808.52,3530.21) 2821.93,3530.21 cw(c2808.52,3530.21) 2796.01,3525.36 ccw(c2762.67,3512.44) 2772.73,3546.75 2762,3547.43 2734.78,3548.2
  pour cut-out: 3170.98,3725.05 ccw(c2489.26,3492.24) 2489.28,4212.61 cw(c2489.28,4226.03) 2489.28,4239.44 cw(c2489.28,3492.27) 3196.35,3733.77 cw(c3059.47,3687.02) 3204.11,3687.02 cw(c3059.49,3687.02) 3202.25,3663.86 cw(c3189,3666.01) 3175.76,3668.15 ccw(c3059.48,3687.02) 3177.28,3687.02 ccw(c3059.48,3687.02)
  region net TX2A_P: 3258,2841 3258,2801 3219,2742 3204,2742 3201,2744 3201,2803 3203,2838 3205,2844 3253,2844 3258,2841
  region net TX2A_N: 3119.98,2840.75 3119.98,2800.75 3158.98,2741.75 3173.98,2741.75 3176.98,2743.75 3176.98,2802.75 3174.98,2837.75 3172.98,2843.75 3124.98,2843.75 3119.98,2840.75
  region net TX1A_P: 3169.98,3352.6 3169.98,3392.6 3208.98,3451.6 3223.98,3451.6 3226.98,3449.6 3226.98,3390.6 3224.98,3355.6 3222.98,3349.6 3174.98,3349.6 3169.98,3352.6
  region net TX1A_N: 3306.6,3352.6 3306.6,3392.6 3267.6,3451.6 3252.6,3451.6 3249.6,3449.6 3249.6,3390.6 3251.6,3355.6 3253.6,3349.6 3301.6,3349.6 3306.6,3352.6

## Silkscreen, mask and mechanical layers (free items; w line width, h text height)
Bottom Solder:
  lines w10: 3329.96,2916.77 3345.71,2901.02
  lines w11: 2363.07,3561.61 2734.97,3561.61 2762.61,3560.83 2774.95,3560.05 cw(c2762.67,3512.44) 2808.52,3530.21 ; 2489.28,4226.03 cw(c2489.28,3492.27) 3183.65,3729.44 cw(c3059.48,3687.02) 3189,3666.01 ; 2493.73,1951.47 ccw(c2493.73,2752.58) 3227.23,2430.47 ccw(c3061.15,2492.01) 3238.23,2488.47 3239,2526.99 ; 2497,2677.7 cw(c2497,2491.37) 2628.75,2623.13 2646.76,2605.12 ccw(c2790.15,2748.52) 2790.16,2545.73 ccw(c2790.16,2673.32) 2880.38,2583.1 2892.44,2595.16
  lines w11.55: 2688.72,3105.51 2885.99,3105.51 ; 2886.23,3105.75 2983.5,3105.75 ; 3345.71,2901.02 3390.74,2843.49 3481.43,2727.63 cw(c3359.89,2632.5) 3514.23,2632.5
  lines w15.5: 2374.28,4226.03 2489.28,4226.03 ; 2378.73,1951.47 2493.73,1951.47
Mechanical 1:
  lines w10: 2272,4472 2272,1703 5639,1703 5640,1704 5640,4473 2273,4473